# Altium PCB buck-converter-altium.PcbDoc
Units mil, origin at the board's own origin, x right, y up, seen from the top; angles counter-clockwise.
Board outline 6000 x 4000 mil, 2 copper layers (Top Layer, Bottom Layer); 17 components, 14 nets, 44 pads, 0 vias.
Unrouted connection lines stored in the file: 11.
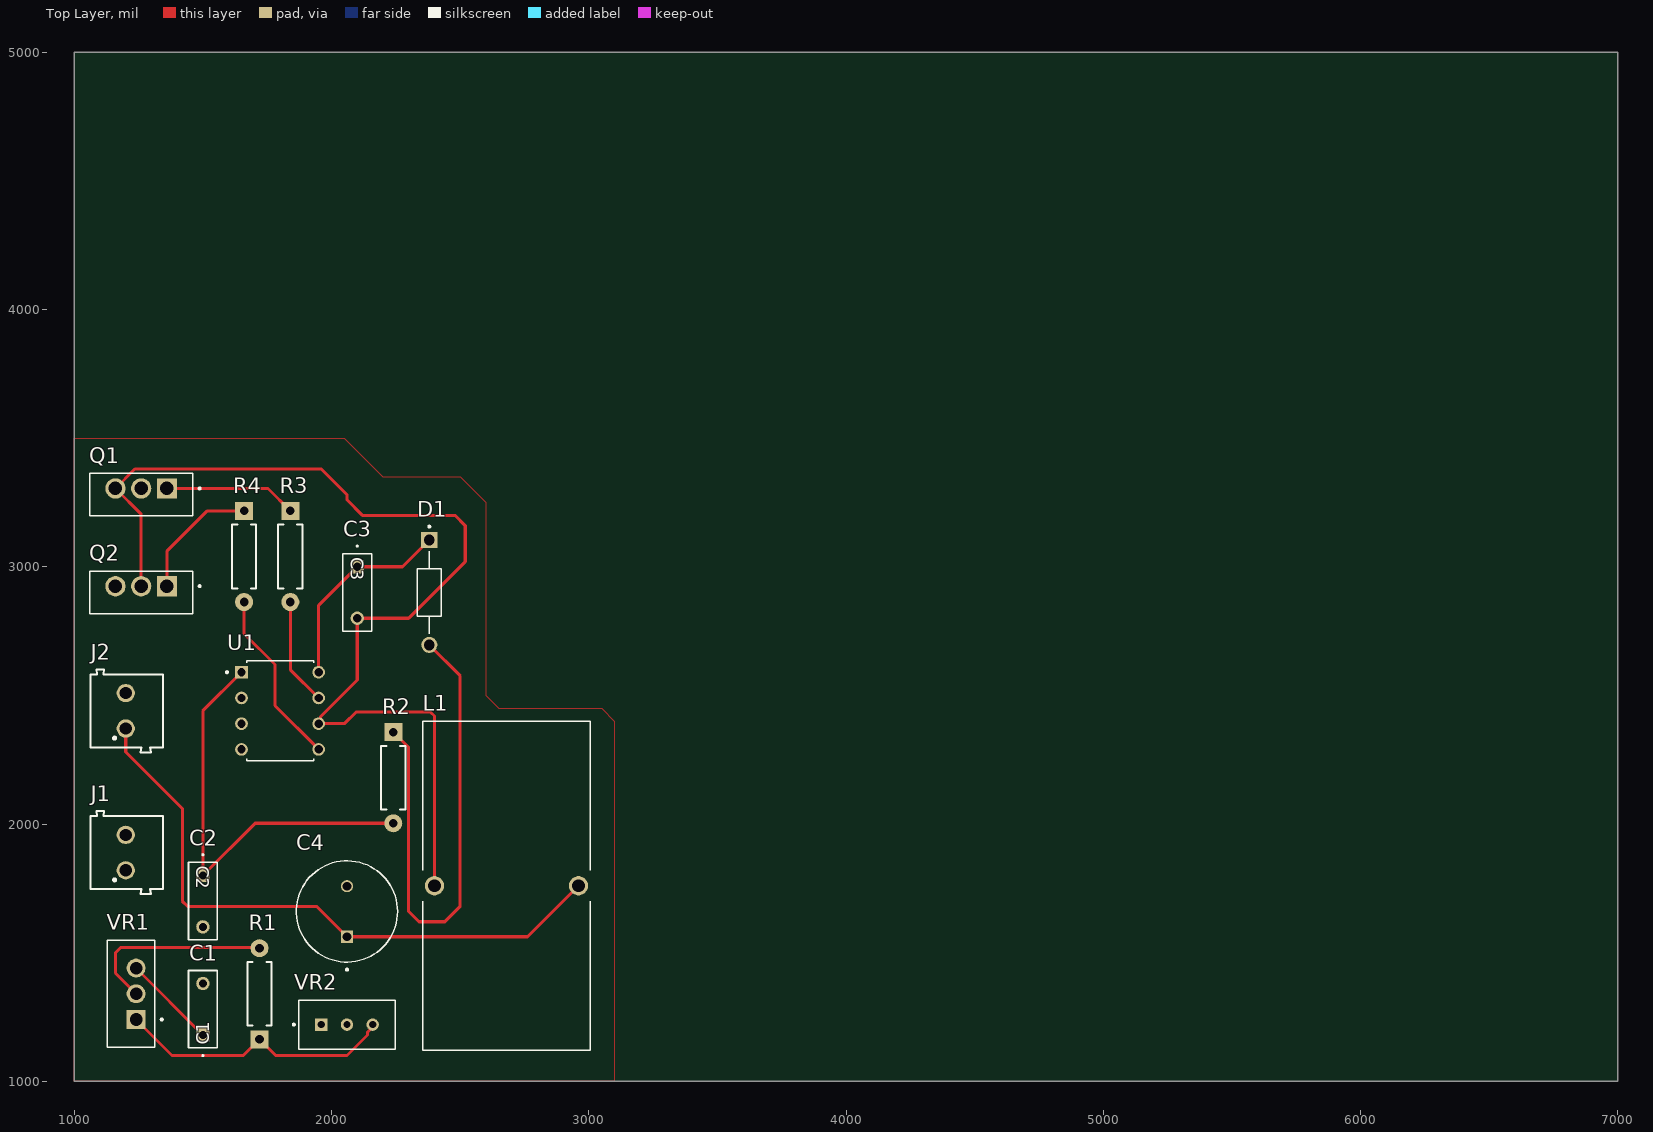
[diagram p0: Top Layer view]
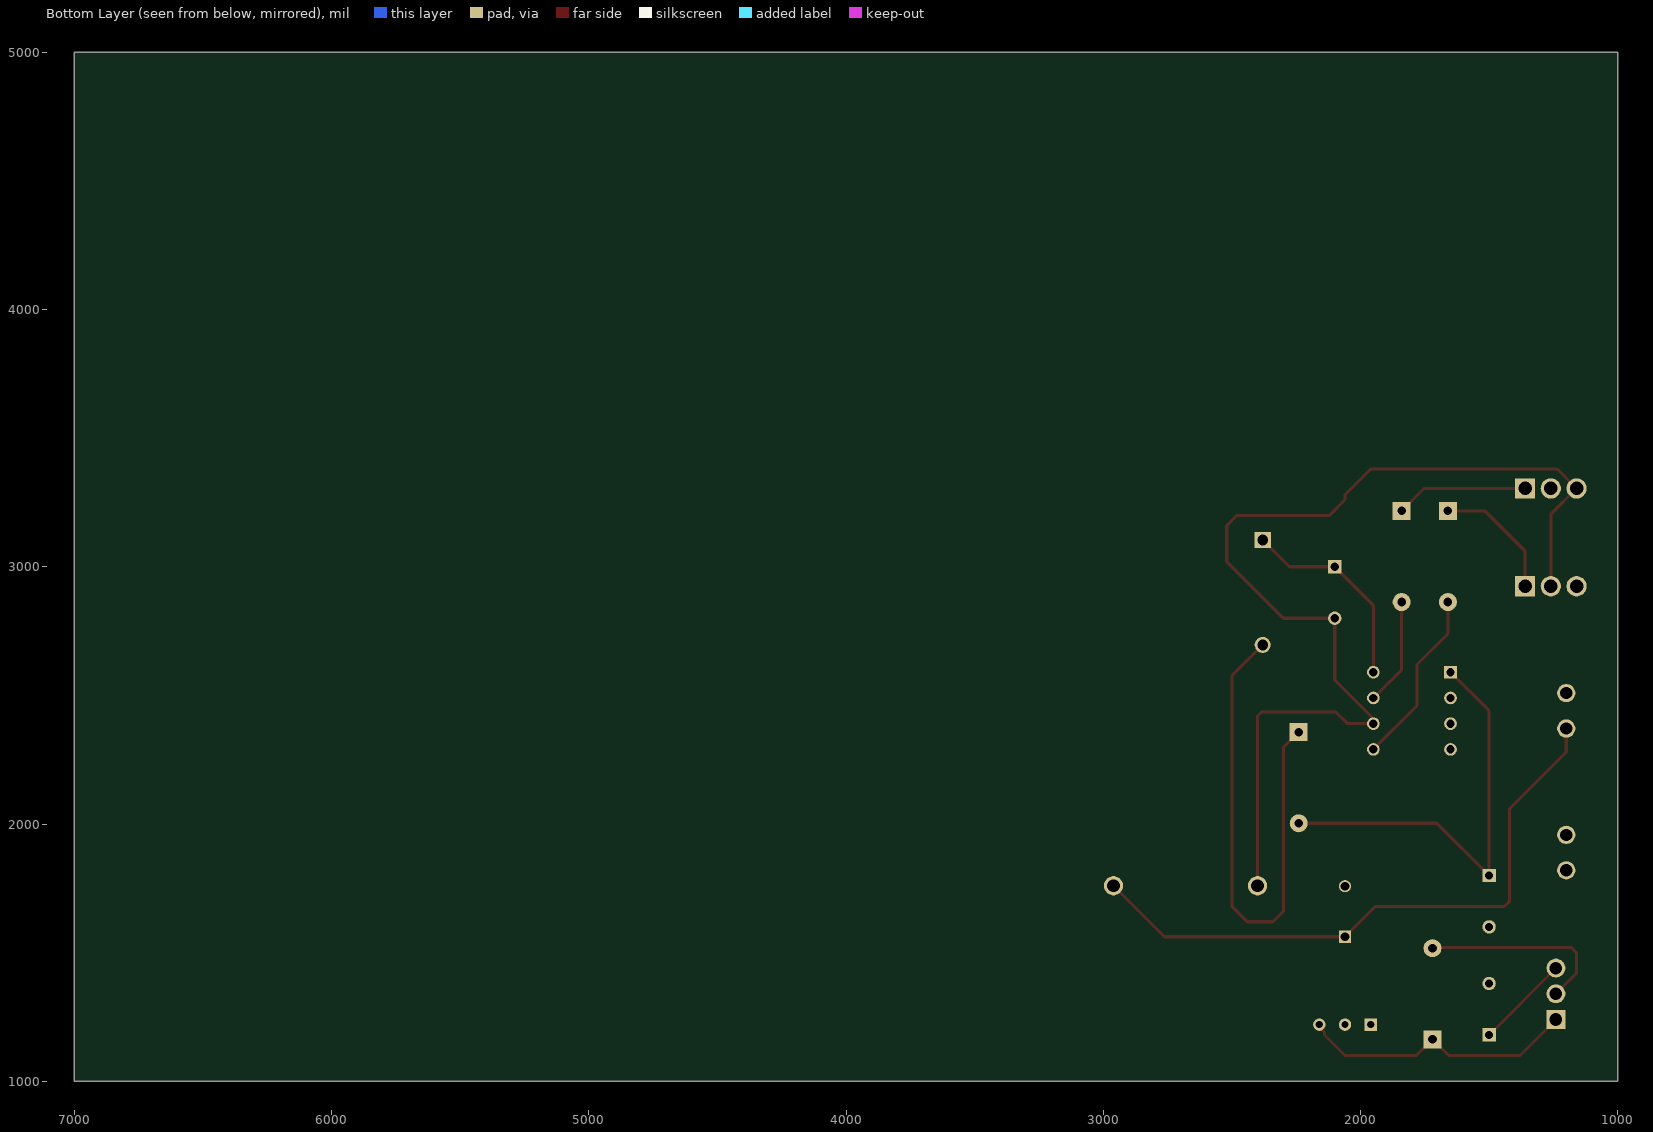
[diagram p1: Bottom Layer view, seen from below]
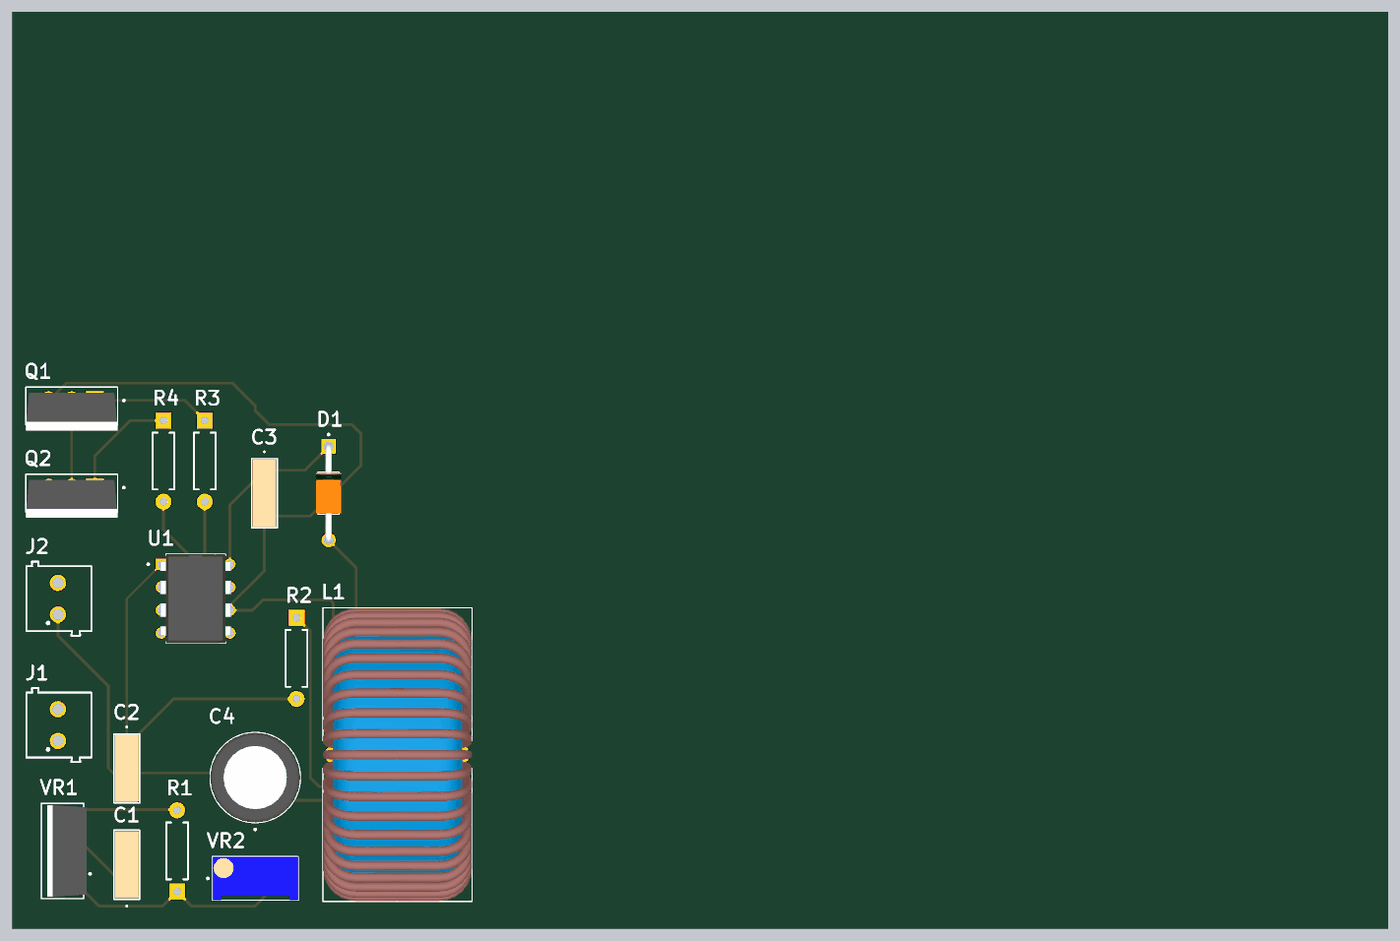
[diagram p2: 3D render of the assembled board from above, using the file's embedded part models]

## Layer stack, top to bottom
Top Solder: solder mask 0.4, Solder Resist, Dk 3.5
Top Layer: signal copper 1.4
Dielectric 1: dielectric 12.6, FR-4, Dk 4.8
Bottom Layer: signal copper 1.4
Bottom Solder: solder mask 0.4, Solder Resist, Dk 3.5

## Board outline
1000,1000 7000,1000 7000,5000 1000,5000

## Design rules (kind name [scope] priority, off if disabled: settings)
Clearance [All] p1: gap=10 ignorepadtopadclearanceinfootprint=FALSE except(0: Arc-Hole Track-Hole SMDPad-Hole THPad-Hole Via-Hole Fill-Hole Poly-Hole Region-Hole Text-Hole)
ComponentClearance [All] p1 off: gap=10 collisioncheckmode=3 verticalgap=10 showdistances=FALSE
Height [All] p1 off: minheight=0 maxheight=1000 prefheight=500
HoleSize [All] p1: absolutevalues=TRUE maxlimit=118.11 minlimit=27.56 maxpercent=80.000 minpercent=20.000
MinimumSolderMaskSliver [All] p1: minsoldermaskwidth=4.92
PlaneConnect [All] p1: planeconnectstyle=Relief reliefexpansion=20 reliefentries=4 reliefconductorwidth=12 reliefairgap=10
PolygonConnect [All] p1: connectstyle=Relief reliefconductorwidth=19.68 reliefentries=4 polygonreliefangle="90 Angle" airgapwidth=7.87
RoutingVias [All] p1: holewidth=27.56 width=66.93 viastyle="Through Hole" minholewidth=27.56 minwidth=66.93 maxholewidth=27.56 maxwidth=66.93
SilkToSilkClearance [All] p1: silktosilkclearance=4.72
SilkToSolderMaskClearance [IsPad] p1: minsilkscreentomaskgap=3.94 clearancetoexposedcopper=TRUE
SolderMaskExpansion [All] p1: expansion=4 istentingtop=FALSE
SupplyNets "Schematic Supply Nets_2" [InNet('GND')] p1: voltage=0.000
SupplyNets "Schematic Supply Nets_1" [InNet('+3V3')] p2: voltage=0.000
SupplyNets "Schematic Supply Nets" [InNet('+5')] p3: voltage=0.000
Width [All] p1: maxlimit=120 minlimit=12 preferedwidth=20
23 further rules are at their usual default settings.

## Components (designator, comment, footprint, x,y, rotation, side; value= is the part's Value field where it differs from the comment)
C1 "100nF" CAP_R82E-7P4X2P6-5P0_KEM 1500,1180 r90 top
C2 "100nF" CAP_R82E-7P4X2P6-5P0_KEM 1500,1800 r270 top
C3 "100nF" CAP_R82E-7P4X2P6-5P0_KEM 2100,3000 r270 top
C4 "220uF" CAPPRD500W60D1000H1350 2060,1660 r90 top
D1 "1N4006" DIOAD1036W78L470D235 2380,2900 r270 top
J1 "Vin" 691103110002 1200,1888.9 r90 top
J2 "LOAD" 691103110002 1200,2440 r90 top
L1 "HCTI-330-5.2" IND_HCTI-220-5.8 2680,1760 r0 top
Q1 "IRF2807ZPBF" TO254P1016X419X2057-3 1260,3280 r180 top
Q2 "IRF2807ZPBF" TO254P1016X419X2057-3 1260,2900 r180 top
R1 "4k7 resistor Axial" RESA60-630X240 1720,1340 r90 top value=240
R2 "4k7 resistor Axial" RESA60-630X240 2240,2180 r270 top value=30
R3 "4k7 resistor Axial" RESA60-630X240 1840,3040 r270 top value=10
R4 "4k7 resistor Axial" RESA60-630X240 1660,3040 r270 top value=10
U1 "IR2104" DIP762W45P254L988H533Q8 1800,2440 r0 top
VR1 "LM317T" TO254P1054X470X1955-3 1240,1340 r90 top
VR2 "" TRIM_3296W-1-202RLF 2060,1220 r0 top

## Footprints (in the part's own frame and the unit in brackets; to place one, negate y for a bottom-side part, rotate by r counter-clockwise, add the part's x,y. Pads: shape width x height; smd on the part's side, far side on the other; paste and mask are expansions set on the pad)
691103110002 [mm]
  round 1.8 hole 1.2: 1(-1.75,0) 2(1.75,0)
  silkscreen extent -4.1,-3.7 4.1,3.5
CAP_R82E-7P4X2P6-5P0_KEM [mil]
  rect 52x52 hole 32 paste-99999 mask+0: 1(0,0)
  round 52 hole 32 paste-99999 mask+0: 2(200,0)
  silkscreen extent -83,-56 250,56, body extent -46,-51 246,51, height 260
CAPPRD500W60D1000H1350 [mm]
  rect 1.2x1.2 / inner round 1.2 / far side rect 1.2x1.2 hole 0.85 mask+0.102: 1(-2.5,0)
  round 1.2 hole 0.85 mask+0.102: 2(2.5,0)
  silkscreen extent -5.85,-5 5,5, body extent -5,-5 5,5, height 13.5
DIOAD1036W78L470D235 [mm]
  round 1.59 hole 1.06 mask+0.102: A(5.18,0)
  rect 1.59x1.59 / inner round 1.59 / far side rect 1.59x1.59 hole 1.06 mask+0.102: C(-5.18,0)
  silkscreen extent -6.6,-1.17 4.07,1.17, body extent -5.55,-1.4 5.55,1.4, height 2.8
DIP762W45P254L988H533Q8 [mm]
  rect 1.25x1.25 / inner round 1.25 / far side rect 1.25x1.25 hole 0.83: 1(-3.81,3.81)
  round 1.25 hole 0.83: 2(-3.81,1.27) 3(-3.81,-1.27) 4(-3.81,-3.81) 5(3.81,-3.81) 6(3.81,-1.27) 7(3.81,1.27) 8(3.81,3.81)
  silkscreen extent -5.35,-4.94 3.3,4.94, body extent -3.96,-4.94 3.96,4.94, height 5.33
IND_HCTI-220-5.8 [mil]
  round 75 hole 50 mask+4.02: 1(-280,0) 2(280,0)
  silkscreen extent -325,-640 325,640, body extent -325,-638 325,638, height 1342
RESA60-630X240 [mil]
  rect 70x70 hole 33.46: 1(-177.17,0)
  round 70 hole 33.46: 2(177.17,0)
  silkscreen extent -124,-47 124,47, body extent -188,-47 188,47, height 94
TO254P1016X419X2057-3 [mm]
  rect 2x2 / inner round 2 / far side rect 2x2 hole 1.33: 1(-2.54,-0.62)
  round 2 hole 1.33: 2(0,-0.62) 3(2.54,-0.62)
  silkscreen extent -5.87,-2.1 5.08,2.1, body extent -5.08,-1.47 5.08,2.72, height 20.57
TO254P1054X470X1955-3 [mm]
  rect 1.86x1.86 / inner round 1.86 / far side rect 1.86x1.86 hole 1.24: 1(-2.54,0)
  round 1.86 hole 1.24: 2(0,0) 3(2.54,0)
  silkscreen extent -5.27,-2.64 5.27,2.86, body extent -5.08,-2.17 5.08,2.18, height 20.4
TRIM_3296W-1-202RLF [mm]
  rect 1.218x1.218 / inner round 1.218 / far side rect 1.218x1.218 hole 0.71: 1(-2.54,0)
  round 1.218 hole 0.71: 2(0,0) 3(2.54,0)
  silkscreen extent -5.35,-2.41 4.76,2.42, body extent -4.76,-2.41 4.76,2.42, height 11.55

## Part data
C1 C2 C3: library part R82EC3100Z370J, "R82, Film, Metallized Polyester Stacked, Automotive Grade, 0.1 uF, 5%, 100 VDC, 85Ã‚Â°C, Lead Spacing = 5mm", Manufacturer_Name=Kemet, Copyright="Copyright (C) 2026 Ultra Librarian. All rights reserved.", Datasheet=https://content.kemet.com/datasheets/KEM_F3101_R82.pdf, Manufacturer_Part_Number=R82EC3100Z370J, Type="Film Capacitor"
C4: library part B41866C7227M000, "220 ÂµF 35 V Aluminum Electrolytic Capacitors Radial, Can 373mOhm @ 100kHz 3000 Hrs @ 125Â°C", Package=None, Check_prices=https://www.snapeda.com/parts/B41866C7227M000/EPCOS/view-part/?ref=eda, MF="EPCOS - TDK Electronics", MP=B41866C7227M000, SnapEDA_Link=https://www.snapeda.com/parts/B41866C7227M000/EPCOS/view-part/?ref=snap
D1: library part 1N4006GH, "1A, 800V, Standard Rectifier", Package="DO-41-2 Taiwan Semiconductor", Check_prices=https://www.snapeda.com/parts/1N4006GH/taiwan/view-part/?ref=eda, MF="Taiwan Semiconductor", MP=1N4006GH, SnapEDA_Link=https://www.snapeda.com/parts/1N4006GH/taiwan/view-part/?ref=snap
J1 J2: library part 691103110002, Package=None, Availability=Unavailable, MF="{'manufacturer': u'Wurth Electronics'}", MP=691103110002, Price=None
L1: "High Current Toroidal Inductor", Package="Radial Bel Fuse", Check_prices=https://www.snapeda.com/parts/HCTI-330-5.2/Signal+Transformer/view-part/?ref=eda, MF="Signal Transformer", MP=HCTI-330-5.2, SnapEDA_Link=https://www.snapeda.com/parts/HCTI-330-5.2/Signal+Transformer/view-part/?ref=snap
Q1 Q2: "MOSFET, Power,N-Ch,VDSS 75V,RDS(ON) 7.5 Milliohms,ID 89A,TO-220AB,PD 170W,-55C", Package="TO-220-3 Infineon", Check_prices=https://www.snapeda.com/parts/IRF2807ZPBF/Infineon/view-part/?ref=eda, MF=Infineon, MP=IRF2807ZPBF, SnapEDA_Link=https://www.snapeda.com/parts/IRF2807ZPBF/Infineon/view-part/?ref=snap
R1 R2 R3 R4: library part CMP-009-00178-1, "Axial Resistor, 4.7 KOhm", Package Description="2-Pin Axial Lead, Dia 2.4 mm, Body Length 6.3 mm", Tolerance=1%, Component Type=Resistors
U1: "Half-Bridge Gate Driver IC Non-Inverting 8-PDIP", Package="DIP-8 Infineon", Check_prices=https://www.snapeda.com/parts/IR2104/Infineon/view-part/?ref=eda, MF="Infineon Technologies", MP=IR2104, SnapEDA_Link=https://www.snapeda.com/parts/IR2104/Infineon/view-part/?ref=snap
VR1: "Linear Voltage Regulator IC Positive Adjustable 1 Output 1.5A TO-220AB", Package="TO-220-3 ON", Check_prices=https://www.snapeda.com/parts/LM317T/Onsemi/view-part/?ref=eda, MF=onsemi, MP=LM317T, SnapEDA_Link=https://www.snapeda.com/parts/LM317T/Onsemi/view-part/?ref=snap
VR2: library part 3296W-1-202RLF, "TRIMMER - 3/8in SQ MT CERMET", Package="NON STANDARD-3 Bourns", Check_prices=https://www.snapeda.com/parts/3296W-1-202RLF/Bourns/view-part/?ref=eda, MF=Bourns, MP=3296W-1-202RLF, SnapEDA_Link=https://www.snapeda.com/parts/3296W-1-202RLF/Bourns/view-part/?ref=snap

## Nets (pads, with @x,y where several pads share a name; then routed paths per layer and width w, separated by ;. In a path a pad name is that pad's centre, name@x,y a point inside that pad or via, vN(x,y) a via of type N, cw(c..) or ccw(c..) an arc to the next point about the centre after c; other vN are vias at no path point)
+36: Q1.2
GND: C1.2 C2.2 C4.2 J1.1 J2.2 Q2.3 U1.4 VR2.1 VR2.2
NetC1_1: C1.1 J1.2 VR1.3 | length 367.7
  Top Layer w12: VR1.3 C1.1
NetC3_1: C3.1 D1.C U1.8 | length 795.2
  Top Layer w12: U1.8 1950,2850 C3.1 2276.06,3000 D1.C
NetC3_2: C3.2 L1.1 Q1.3 Q2.2 U1.6 | length 4173.7
  Top Layer w12: Q2.2 1260,3204.41 Q1.3 1235.59,3380 1960,3380 2060,3280 2060,3260 2120,3200 2480,3200 2520,3160 2520,3020 2300,2800 C3.2 2100,2560 1957.12,2417.12 1957.12,2397.12 U1.6 2050,2390 2095.03,2435.03 2384.97,2435.03 2400,2420 L1.1
NetC4_1: C4.1 J2.1 L1.2 | length 2441.8
  Top Layer w12: J2.1 1200,2280 1420,2060 1420,1700 1440,1680 1941.57,1680 C4.1 2761.57,1561.57 L1.2
NetD1_A: D1.A R2.1 | length 2029.2
  Top Layer w12: R2.1 2300,2297.17 2300,2137.87 2300,1660 2340,1620 2440,1620 2500,1680 2500,2576.06 D1.A
NetQ1_1: Q1.1 R3.1 | length 516.1
  Top Layer w12: Q1.1 1752.76,3304.41 R3.1
NetQ2_1: Q2.1 R4.1 | length 500.7
  Top Layer w12: Q2.1 1360,3060 1517.17,3217.17 R4.1
NetR1_1: R1.1 VR1.1 VR2.3 | length 1091.5
  Top Layer w12: VR1.1 1380,1100 1657.17,1100 R1.1 1782.83,1100 2060,1100 2140,1180 2140,1190.27 2160,1210.27 VR2.3
NetR3_2: R3.2 U1.7 | length 418.4
  Top Layer w12: R3.2 1840,2600 U1.7
NetR4_2: R4.2 U1.5 | length 693
  Top Layer w12: R4.2 1660,2740 1780,2620 1780,2460 U1.5
PWM: U1.2
V_REG: C2.1 R1.2 R2.2 U1.1 U1.3 VR1.2 | length 2438.7
  Top Layer w12: VR1.2 1160,1420 1160,1500 1180,1520 1717.17,1520 R1.2 ; U1.1 1500,2440 C2.1 1702.83,2002.83 R2.2

## Polygon pours and split planes (outlines as drawn)
GND on Top Layer "GNDPLANE" (solid, pour order 0): 1000,3500 2050,3500 2200,3350 2500,3350 2600,3250 2600,2500 2650,2450 3050,2450 3100,2400 3100,1000 1000,1000